# Altium PCB PCB1.PcbDoc
Units mil, origin at the board's own origin, x right, y up, seen from the top; angles counter-clockwise.
Board outline 1560 x 2400 mil, 2 copper layers (Top Layer, Bottom Layer); 17 components, 21 nets, 84 pads, 14 vias.
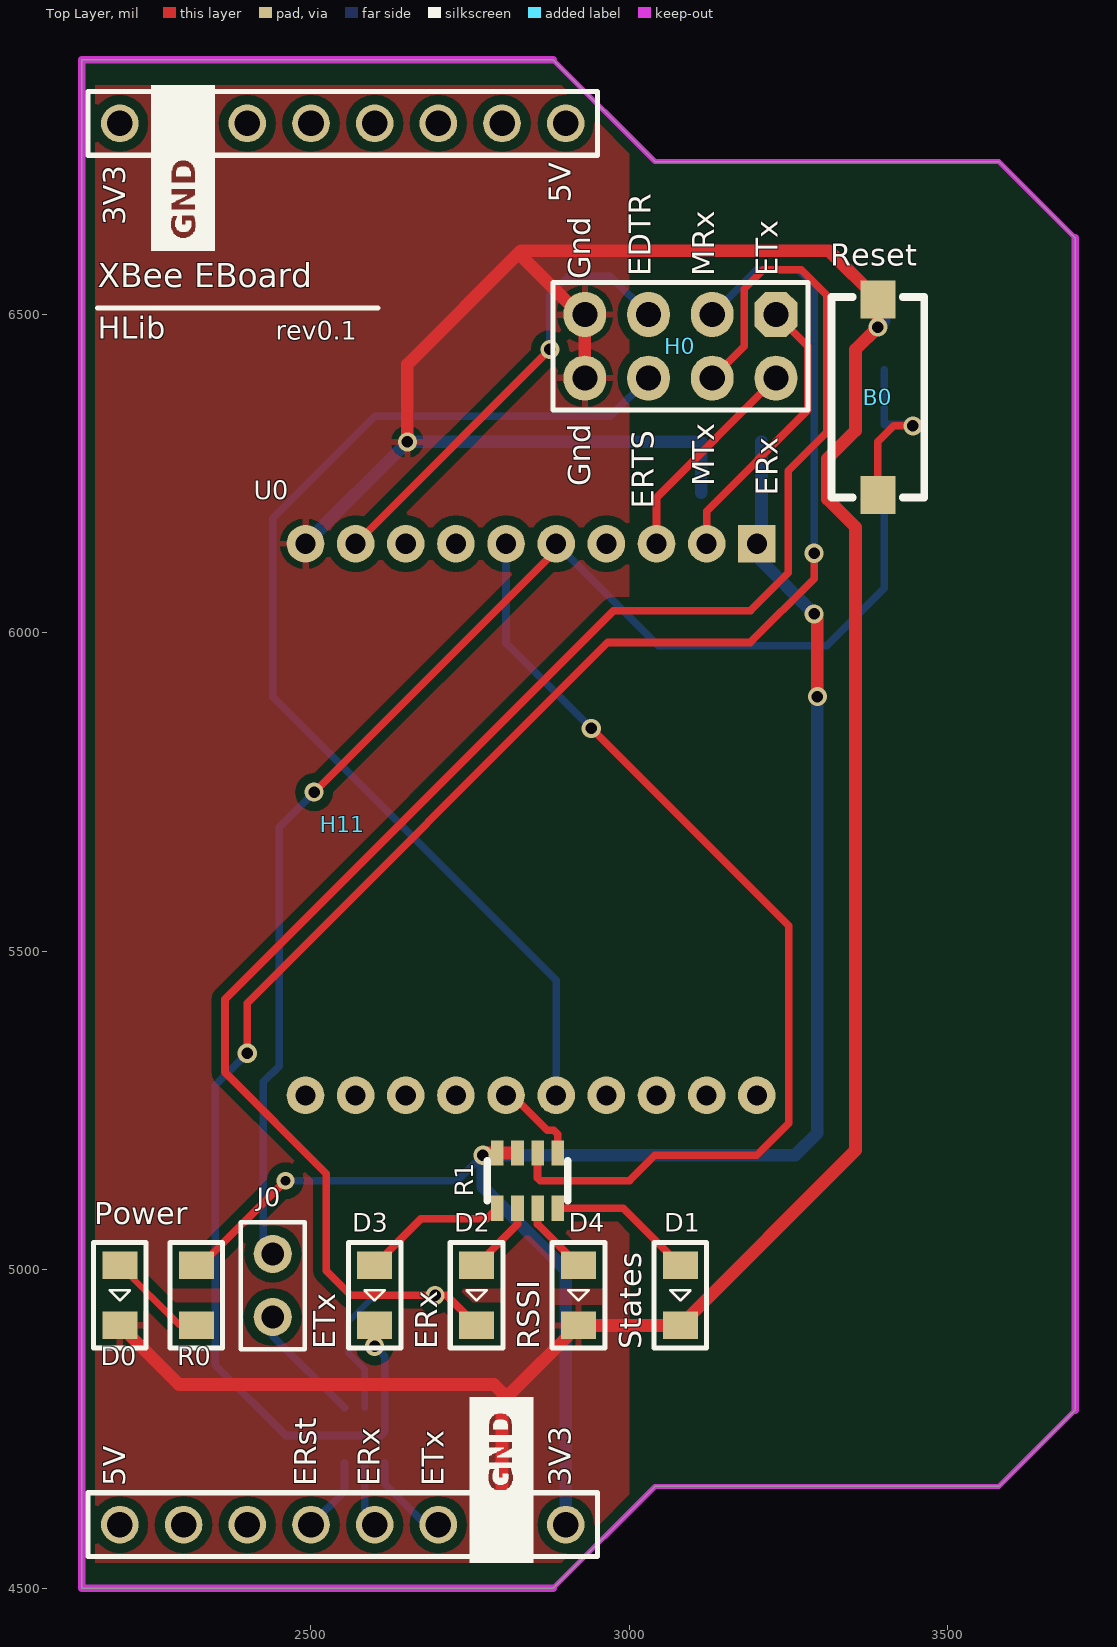
[diagram p0: Top Layer view]
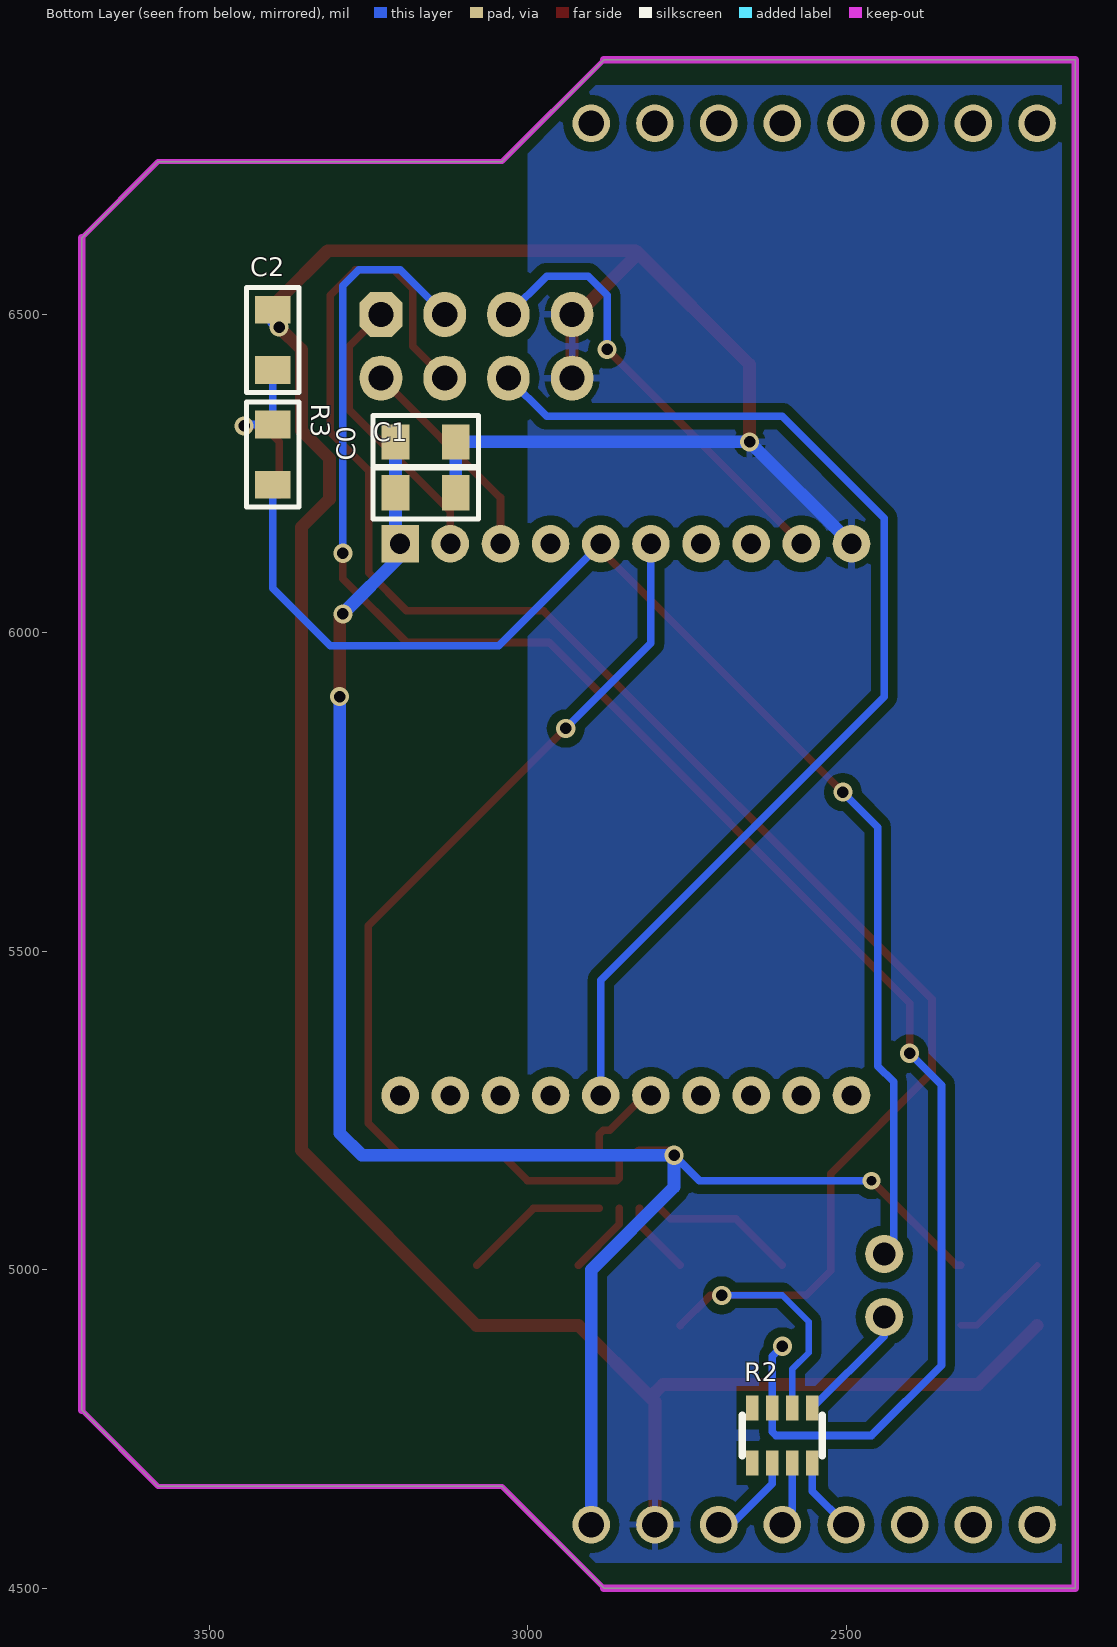
[diagram p1: Bottom Layer view, seen from below]
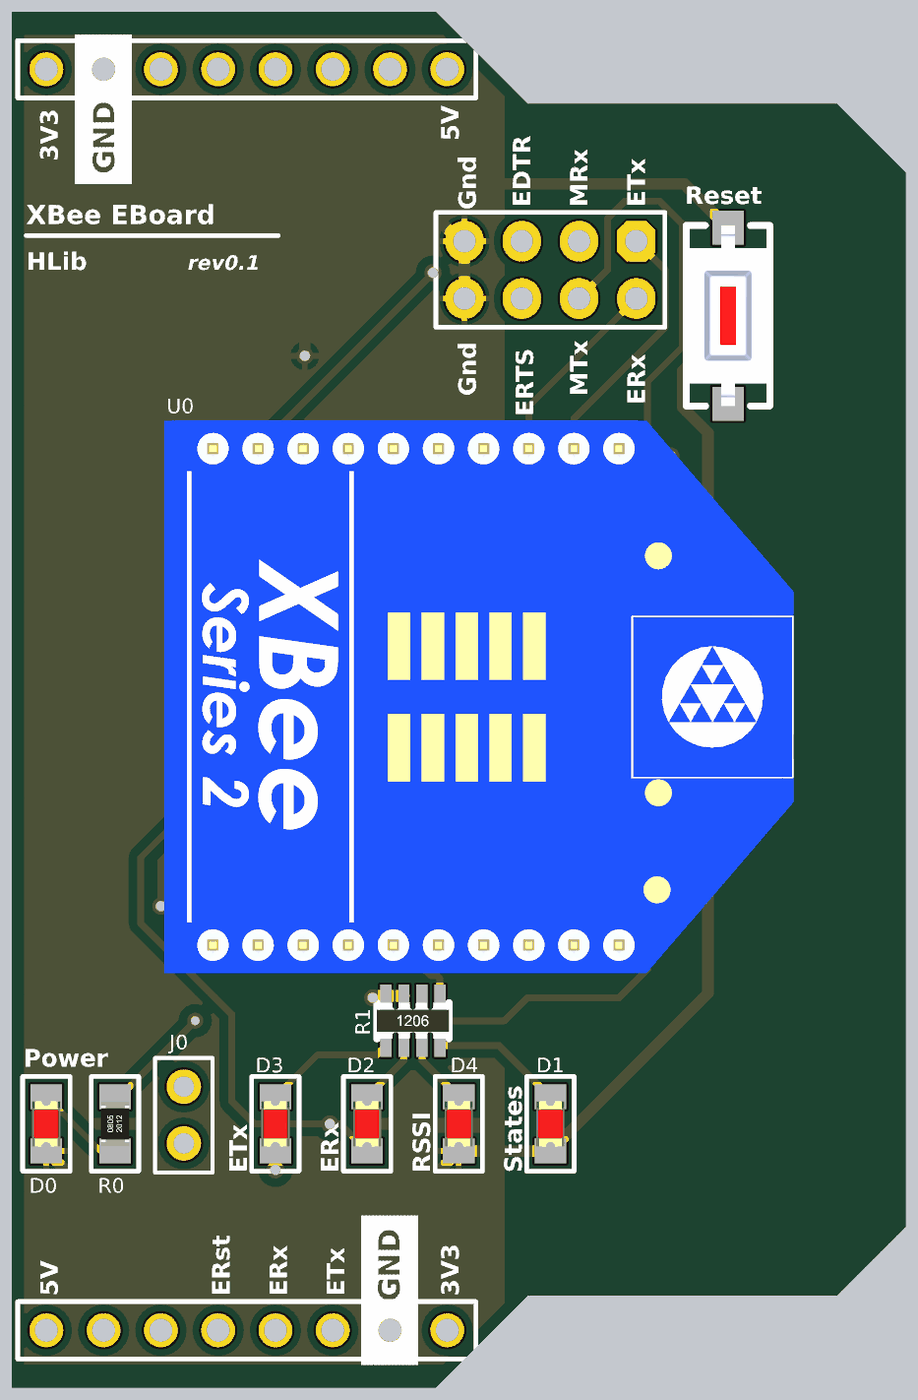
[diagram p2: 3D render of the assembled board from above, using the file's embedded part models]
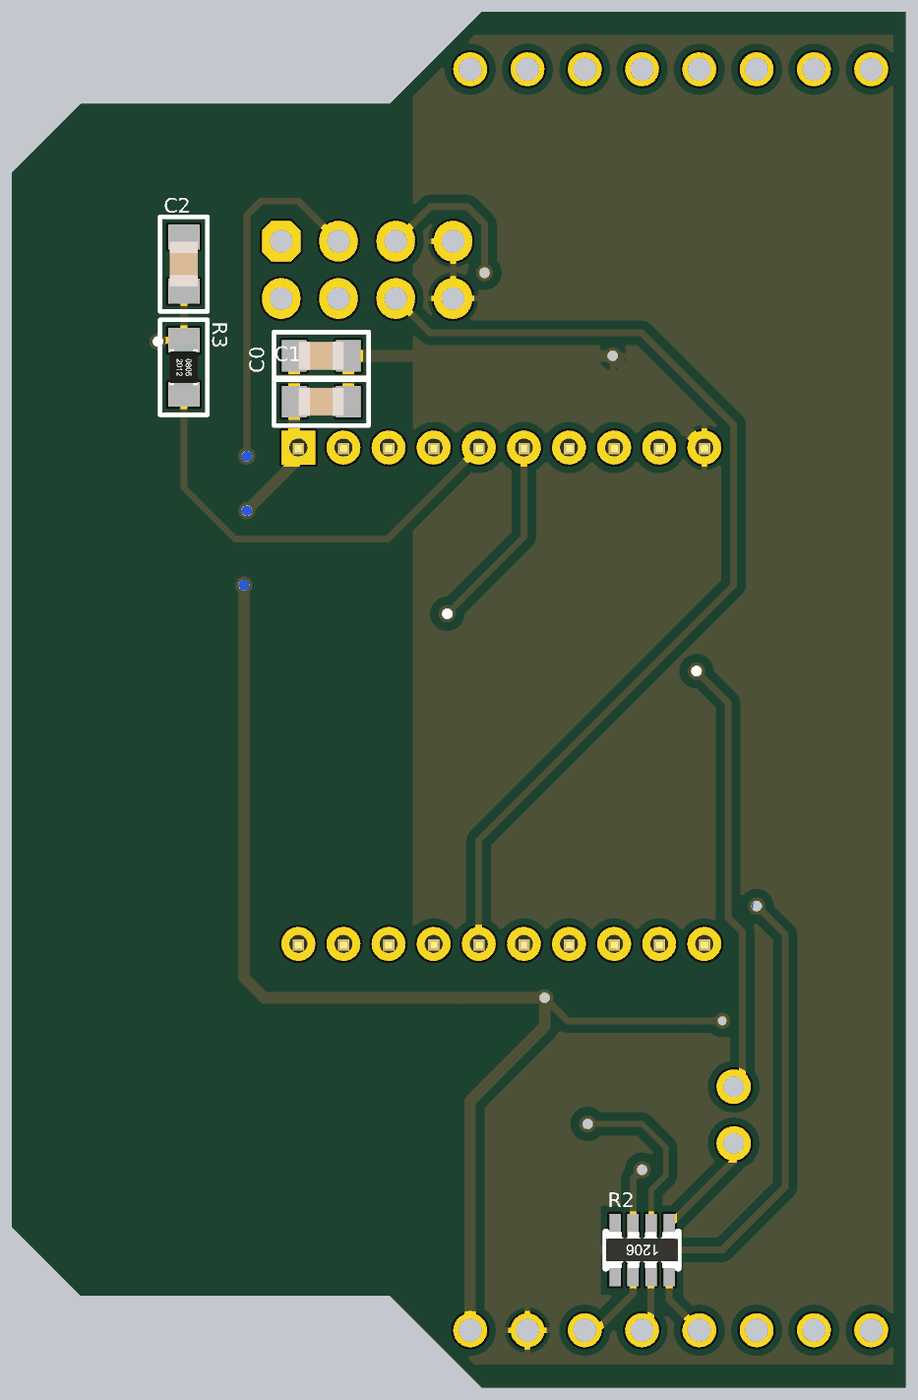
[diagram p3: 3D render of the assembled board from below, using the file's embedded part models]

## Layer stack, top to bottom
Top Solder: solder mask 0.4, Solder Resist, Dk 3.5
Top Layer: signal copper 1.4
Dielectric1: dielectric 12.6, FR-4, Dk 4.8
Bottom Layer: signal copper 1.4
Bottom Solder: solder mask 0.4, Solder Resist, Dk 3.5

## Board outline
2140,6900 2880,6900 3040,6740 3580,6740 3700,6620 3700,4780 3580,4660 3040,4660 2880,4500 2140,4500

## Design rules (kind name [scope] priority, off if disabled: settings)
Clearance [InPolygon] p1: gap=15
Clearance Clearance_1 [All] p2: gap=10
PolygonConnect [All] p1: connectstyle=Relief reliefconductorwidth=10 reliefentries=4 polygonreliefangle="90 Angle" airgapwidth=10
RoutingVias [All] p1: holewidth=25 width=40 viastyle="Through Hole" minholewidth=28 minwidth=50 maxholewidth=28 maxwidth=50
SolderMaskExpansion [All] p1: expansion=4
Width [All] p1: maxlimit=25 minlimit=8 preferedwidth=10
30 further rules are at their usual default settings.

## Components (designator, comment, footprint, x,y, rotation, side; value= is the part's Value field where it differs from the comment)
B0 "SW" SW2SMD 3390,6370 r90 top
C0 "C_Ceramic" SM_0805_C_CERAMIC 3160,6300 r0 bottom
C1 "C_Ceramic" SM_0805_C_CERAMIC 3160,6220 r0 bottom
C2 "C_Ceramic" SM_0805_C_CERAMIC 3400,6460 r270 bottom
D0 "LED" SM_0805_LED 2200,4960 r270 top
D1 "LED" SM_0805_LED 3080,4960 r270 top
D2 "LED" SM_0805_LED 2760,4960 r270 top
D3 "LED" SM_0805_LED 2600,4960 r270 top
D4 "LED" SM_0805_LED 2920,4960 r270 top
H0 "HD_4x2" HD_male_4x2_100mil_straight 3080,6450 r180 top
H11 "MBoard1_BH_DualPorts" MBoard1_BH_DualPorts 2200,6800 r0 top
J0 "Jumper 2" J2 2440,5025 r270 top
R0 "R" SM_0805_R 2320,4960 r90 top
R1 "RA4" RA4 2840,5140 r0 top
R2 "RA4" RA4 2600,4740 r0 bottom
R3 "R" SM_0805_R 3400,6280 r270 bottom
U0 "XBee_1mW" XBee 3200,6140 r270 top

## Footprints (in the part's own frame and the unit in brackets; to place one, negate y for a bottom-side part, rotate by r counter-clockwise, add the part's x,y. Pads: shape width x height; smd on the part's side, far side on the other; paste and mask are expansions set on the pad)
HD_male_4x2_100mil_straight [mm]
  oct 1.7x1.8 hole 1: 1(-3.81,-1.27)
  oval 1.7x1.8 hole 1: 2(-3.81,1.27) 3(-1.27,-1.27) 4(-1.27,1.27) 5(1.27,-1.27) 6(1.27,1.27) 7(3.81,-1.27) 8(3.81,1.27)
  Mechanical 15 keep-out lines w0.1: 5.08,2.54 -5.08,2.54 -5.08,-2.54 5.08,-2.54 5.08,2.54
  silkscreen extent -5.08,-2.54 5.08,2.54, body extent -5.08,-2.54 5.08,2.54, height 8
J2 [mil] "Jum select vdd or gnd"
  round 60 hole 36: 1(0,0) 2(99,0)
  silkscreen extent -50,-50 150,50
MBoard1_BH_DualPorts [mm]
  round 1.5 hole 1.02: 1(0,0) 2(2.54,0) 3(5.08,0) 4(7.62,0) 5(10.16,0) 6(12.7,0) 7(15.24,0) 8(17.78,0) 9(17.78,-55.88) 10(15.24,-55.88) 11(12.7,-55.88) 12(10.16,-55.88) 13(7.62,-55.88) 14(5.08,-55.88) 15(2.54,-55.88) 16(0,-55.88)
  silkscreen extent -1.27,-57.15 19.05,1.27, body extent -1.27,-57.15 19.05,1.27, height 8
RA4 [mm] "Resistor Array (0603x4) form TME"
  rect 0.5x1 smd: 1(-1.2,-1.1) 2(-1.2,1.1) 3(-0.4,-1.1) 4(-0.4,1.1) 5(0.4,-1.1) 6(0.4,1.1) 7(1.2,-1.1) 8(1.2,1.1)
  silkscreen extent -1.6,-0.8 1.6,0.8, body extent -1.6,-0.8 1.6,0.8, height 0.5
SM_0805_C_CERAMIC [mm] "General Surface-mount cap, low density"
  rect 1.1x1.4 smd: 1(-1.2,0) 2(1.2,0)
  silkscreen extent -2.1,-1.05 2.1,1.05, body extent -1,-0.62 1,0.63, height 0.58
SM_0805_LED [mm] "General polarized surface-mount Led, low density"
  rect 1.1x1.4 smd: 1(-1.2,0) 2(1.2,0)
  silkscreen extent -2.1,-1.05 2.1,1.05, body extent -1.01,-0.62 1.01,0.63, height 1.1
SM_0805_R [mm] "General Surface-mount resistor, low density"
  rect 1.1x1.4 smd: 1(-1.2,0) 2(1.2,0)
  silkscreen extent -2.1,-1.05 2.1,1.05, body extent -1,-0.63 1,0.62, height 0.45
SW2SMD [mm]
  rect 1.5x1.4 smd: 1(-3.9,0) 2(3.9,0)
  silkscreen extent -4,-1.85 4,1.85, body extent -4,-1.8 4,1.8, height 2.5
XBee [mm]
  rect 1.5x1.5 hole 0.8: 1(0,0)
  round 1.5 hole 0.8: 2(0,-2) 3(0,-4) 4(0,-6) 5(0,-8) 6(0,-10) 7(0,-12) 8(0,-14) 9(0,-16) 10(0,-18) 11(21.996,-18) 12(21.996,-16) 13(21.996,-14) 14(21.996,-12) 15(21.996,-10) 16(21.996,-8) 17(21.996,-6) 18(21.996,-4) 19(21.996,-2) 20(21.996,0)
  body extent -1.2,-20.16 23.3,7.74, height 3.7

## Part data
B0: library part SW2, "Switch button 2 pin"
C0 C1 C2: "Non-polarity ceramic capacitor"
H0: "Header, 4-pins/row, double row,"
J0: library part "JP 2"
R0 R3: "Resistor"

## Via types
v1: diameter 30, hole 18, Top Layer to Bottom Layer, tented both sides, 13 vias
v2: diameter 28, hole 15, Top Layer to Bottom Layer, tented both sides, 1 vias

## Nets (pads, with @x,y where several pads share a name; then routed paths per layer and width w, separated by ;. In a path a pad name is that pad's centre, name@x,y a point inside that pad or via, vN(x,y) a via of type N, cw(c..) or ccw(c..) an arc to the next point about the centre after c; other vN are vias at no path point)
3V3: C0.2 C1.2 H11.9 R0.2 R1.2 R1.4 U0.1 | length 2877.9
  Top Layer w12: R0.2 2327.24,5007.24 v2(2460,5140)
  Top Layer w20: v1(2770,5180) 2773.31,5183.31 R1.2 R1.4 ; v1(3290,6030) 3295,6025 v1(3295,5900)
  Bottom Layer w12: v2(2460,5140) 2730,5140 v1(2770,5180)
  Bottom Layer w20: H11.9 2900,5000 2770,5130 v1(2770,5180) 3260,5180 3295,5215 v1(3295,5900) ; C0.2 C1.2 3207.24,6147.24 U0.1 3200,6120 v1(3290,6030)
GND: B0.2 C0.1 C1.1 C2.1 D0.2 D1.2 D4.2 H0.7 H0.8 H11.10 U0.10 | length 4960.5
  Top Layer w20: D0.2 2292.76,4820 2787.24,4820 2807.24,4800 ; v1(2651.34,6300) 2651.34,6421.34 2830,6600 3313.54,6600 B0.2 v1(3390,6480) 3355,6445 3355,6317.56 3311.09,6273.64 3311.09,6210 3355,6166.09 3355,5187.76 D1.2 D4.2 2807.24,4800 ; H11.10 2800,4792.76 2807.24,4800 ; 2826,6596 2922,6500 H0.7 H0.8
  Bottom Layer w20: U0.10 v1(2651.34,6300) C0.1 C1.1 ; v1(3390,6480) 3400,6490 C2.1
NetB0_1: B0.1 C2.2 R3.1 | length 280.3
  Top Layer w12: B0.1 3390,6300 3415,6325 v1(3445,6325)
  Bottom Layer w12: C2.2 R3.1 3442.76,6327.24 v1(3445,6325)
NetD0_1: D0.1 R0.1 | length 159.1
  Top Layer w10: D0.1 2294.49,4912.76 R0.1
NetD1_1: D1.1 R1.7 | length 229.8
  Top Layer w12: R1.7 2990.55,5096.69 D1.1
NetD2_1: D2.1 R1.3 | length 116.1
  Top Layer w12: D2.1 2824.25,5071.5 R1.3
NetD3_1: D3.1 R1.1 | length 229.8
  Top Layer w12: D3.1 2672.76,5080 2776.06,5080 R1.1
NetD4_1: D4.1 R1.5 | length 116.1
  Top Layer w12: R1.5 2855.75,5071.5 D4.1
NetH11_11: H11.11 R2.6 | length 143.3
  Bottom Layer w12: R2.6 2615.75,4664.25 2680,4600 H11.11
NetH11_12: H11.12 R2.4 | length 103.2
  Bottom Layer w12: R2.4 2584.25,4615.75 H11.12
NetH11_13: H11.13 R2.2 | length 118.5
  Bottom Layer w12: H11.13 2552.76,4652.76 R2.2
NetJ0_2: J0.2 R2.1 | length 189.4
  Bottom Layer w12: J0.2 2440,4896.06 R2.1
RSSI: R1.6 U0.6 | length 1566.1
  Top Layer w12: R1.6 2855.75,5144.25 2860,5140 3000,5140 3040,5180 3200,5180 3250,5230 3250,5540 v1(2940,5850)
  Bottom Layer w12: U0.6 2806.3,5983.7 v1(2940,5850)
RST: J0.1 R3.2 U0.5 | length 2093
  Top Layer w12: v1(2505,5750) 2885.04,6130.04 U0.5
  Bottom Layer w12: J0.1 2425,5040 2425,5295 2450,5320 2450,5695 v1(2505,5750) ; U0.5 3045.04,5980 3310,5980 3400,6070 R3.2
STATESLED: R1.8 U0.15 | length 135.8
  Top Layer w12: U0.15 2816,5274 2871.01,5218.99 2881.01,5218.99 2887.24,5212.76 R1.8
U_RX: D3.2 H0.3 R2.5 | length 2869.2
  Top Layer w12: v1(2400,5340) 2400,5418.74 2966.26,5985 3190,5985 3290,6085 v1(3290,6125)
  Bottom Layer w12: v1(2400,5340) 2350,5290 2350,4850 2460,4740 2610,4740 2615.75,4745.75 R2.5 2615.75,4864.25 v1(2600,4880) ; H0.3 3200,6570 3265,6570 3290,6545 v1(3290,6125)
U_TX: D2.2 H0.4 R2.3 | length 3005.4
  Top Layer w12: D2.2 2712.76,4960 v1(2695,4960) 2562.76,4960 2523.88,4998.88 2523.88,5151.12 2365,5310 2365,5425 2975,6035 3190,6035 3249.46,6094.46 3249.46,6254.46 3310,6315 3310,6530 3270,6570 3210,6570 3180,6540 3180,6450 H0.4
  Bottom Layer w10: R2.3 2584.25,4844.25 2558.5,4870 2558.5,4918.5 2600,4960 v1(2695,4960)
X_DTR: H0.5 U0.9 | length 708.6
  Top Layer w12: U0.9 v1(2875,6445)
  Bottom Layer w12: v1(2875,6445) 2875,6530 2905,6560 2970,6560 H0.5
X_RTS: H0.6 U0.16 | length 1771.5
  Bottom Layer w12: U0.16 2885.04,5454.96 2440,5900 2440,6180 2600,6340 2970,6340 H0.6
X_RX: H0.2 U0.3 | length 337.7
  Top Layer w12: U0.3 3042.52,6212.52 H0.2
X_TX: H0.1 U0.2 | length 446.5
  Top Layer w12: U0.2 3121.26,6191.26 3280,6350 3280,6450 H0.1
pads on no net: H11.1 H11.2 H11.3 H11.4 H11.5 H11.6 H11.7 H11.8 H11.14 H11.15 H11.16 R2.7 R2.8 U0.4 U0.7 U0.8 U0.11 U0.12 U0.13 U0.14 U0.17 U0.18 U0.19 U0.20

## Polygon pours and split planes (outlines as drawn)
GND on Top Layer "Top" (solid, remove dead copper, pour order 6): 2140,6860 3000,6860 3000,4540 2140,4540
GND on Bottom Layer "Bot" (solid, remove dead copper, pour order 6): 2140,6860 3000,6860 3000,4540 2140,4540

## Keep-outs
Keep-Out Layer:
  the board outline again, w8

## Silkscreen, mask and mechanical layers (free items; w line width, h text height)
Top Overlay:
  drawing of 607 lines, arcs and shapes, not listed
  text "5V" at 2920,6675 h60 r90
  text "3V3" at 2220,6640 h60 r90
  text "Reset" at 3315,6565 h60
  text "EDTR" at 3045,6560 h60 r90
  text "MRx" at 3145,6560 h60 r90
  text "ETx" at 3245,6560 h60 r90
  text "Gnd" at 2950,6555 h60 r90
  text "XBee EBoard" at 2165,6530 h65
  text "HLib" at 2165,6450 h60
  text "rev0.1" at 2445,6450 h50
  text "Gnd" at 2950,6230 h60 r90
  text "MTx" at 3145,6230 h60 r90
  text "ERx" at 3245,6215 h60 r90
  text "ERTS" at 3050,6195 h60 r90
  text "Power" at 2160,5060 h60
  text "ETx" at 2550,4875 h60 r90
  text "ERx" at 2710,4875 h60 r90
  text "RSSI" at 2870,4875 h60 r90
  text "States" at 3030,4875 h60 r90
  text "5V" at 2220,4660 h60 r90
  text "ERst" at 2520,4660 h60 r90
  text "ERx" at 2620,4660 h60 r90
  text "ETx" at 2720,4660 h60 r90
  text "3V3" at 2920,4660 h60 r90
Drill Drawing:
  text ".LEGEND" at 7200,3200 h60
  text "Drill Drawing." at 7200,3100 h60

## Dimensions
2140,4500 to 2140,6900 on Mechanical 1
2140,4540 to 3700,4780 on Mechanical 1